# Altium PCB PCB3.PcbDoc
Units mil, origin at the board's own origin, x right, y up, seen from the top; angles counter-clockwise.
Board outline 6000 x 4000 mil, 2 copper layers (Top Layer, Bottom Layer); 15 components, 19 nets, 63 pads, 0 vias.
Unrouted connection lines stored in the file: 43.
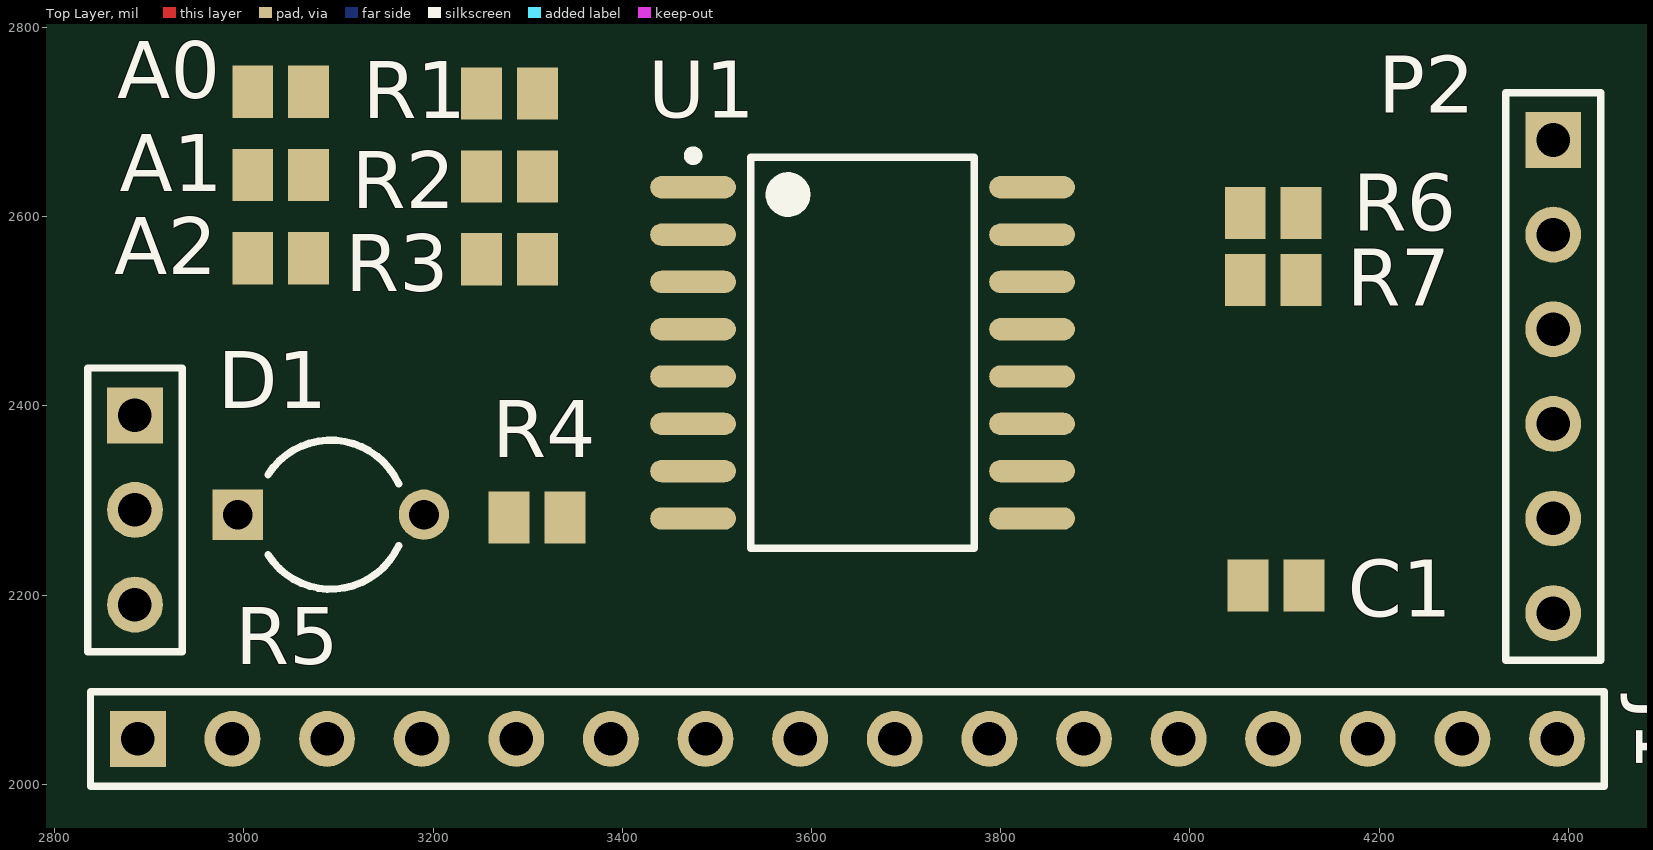
[diagram p0: Top Layer view]
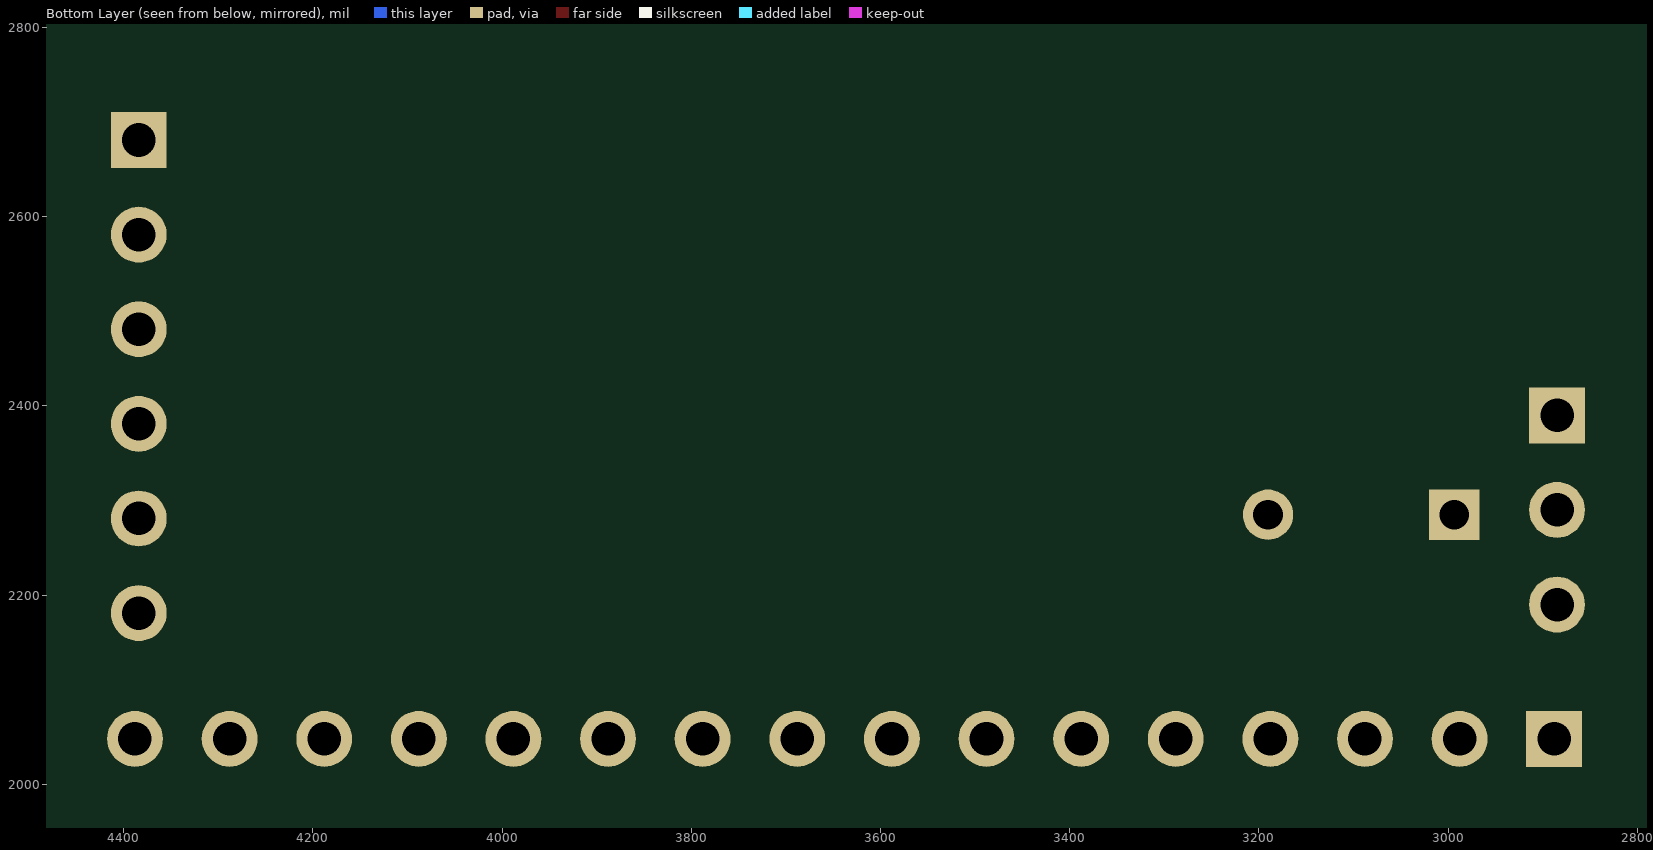
[diagram p1: Bottom Layer view, seen from below]

## Layer stack, top to bottom
Top Layer: signal copper 1.4
Dielectric: dielectric 12.6, FR-4, Dk 4.8
Bottom Layer: signal copper 1.4

## Board outline
1000,1000 7000,1000 7000,5000 1000,5000

## Design rules (kind name [scope] priority, off if disabled: settings)
Clearance [All] p1: gap=10
PolygonConnect [All] p1: connectstyle=Relief reliefconductorwidth=10 reliefentries=4 polygonreliefangle="90 Angle" airgapwidth=10
RoutingVias [All] p1: holewidth=28 width=50 viastyle="Through Hole" minholewidth=28 minwidth=50 maxholewidth=28 maxwidth=50
SilkscreenOverComponentPads [All] p1: minsilkscreentomaskgap=10
SolderMaskExpansion [All] p1: expansion=4
Width [All] p1: maxlimit=10 minlimit=10 preferedwidth=10
27 further rules are at their usual default settings.

## Components (designator, comment, footprint, x,y, rotation, side; value= is the part's Value field where it differs from the comment)
A0 "Res2" C0805 3039,2732 r0 top
A1 "Res2" C0805 3039,2644 r0 top
A2 "Res2" C0805 3039,2556 r0 top
C1 "Cap Semi" C0805 4091,2210 r180 top
D1 "LED0" CAPR5-4X5 3092,2285 r0 top
J1 "LCD1602" HDR1X16 2888,2048 r0 top
P2 "Header 6" HDR1X6 4384,2681 r270 top
R1 "Res2" C0805 3281,2730 r0 top
R2 "Res2" C0805 3281,2642.5 r0 top
R3 "Res2" C0805 3281,2555 r0 top
R4 "Res2" C0805 3310,2282 r0 top
R5 "RPot" HDR1X3 2885,2390 r270 top
R6 "Res2" C0805 4088,2604 r0 top
R7 "Res2" C0805 4088,2533 r0 top
U1 "PCF8574" PCF8574 3654,2456 r0 top

## Footprints (in the part's own frame and the unit in brackets; to place one, negate y for a bottom-side part, rotate by r counter-clockwise, add the part's x,y. Pads: shape width x height; smd on the part's side, far side on the other; paste and mask are expansions set on the pad)
C0805 [mm] "Chip Capacitor, Body 2.0x1.3mm, IPC High Density"
  rect 1.1x1.4 smd: 1(-0.75,0) 2(0.75,0)
  body extent -1.1,-0.72 1.1,0.72, height 1.4
CAPR5-4X5 [mm] "Capacitor; 2 Leads"
  rect 1.35x1.35 hole 0.8: 1(-2.5,0)
  round 1.35 hole 0.8: 2(2.5,0)
  silkscreen extent -1.69,-2 1.82,2
HDR1X3 [mm] "Connector; Header; 3 Position"
  rect 1.5x1.5 hole 0.9: 1(0,0)
  round 1.5 hole 0.9: 2(2.54,0) 3(5.08,0)
  silkscreen extent -1.27,-1.27 6.35,1.27
HDR1X6 [mm] "Connector; Header; 6 Position"
  rect 1.5x1.5 hole 0.9: 1(0,0)
  round 1.5 hole 0.9: 2(2.54,0) 3(5.08,0) 4(7.62,0) 5(10.16,0) 6(12.7,0)
  silkscreen extent -1.27,-1.27 13.97,1.27
HDR1X16 [mm] "Connector; Header; 16 Position"
  rect 1.5x1.5 hole 0.9: 1(0,0)
  round 1.5 hole 0.9: 2(2.54,0) 3(5.08,0) 4(7.62,0) 5(10.16,0) 6(12.7,0) 7(15.24,0) 8(17.78,0) 9(20.32,0) 10(22.86,0) 11(25.4,0) 12(27.94,0) 13(30.48,0) 14(33.02,0) 15(35.56,0) 16(38.1,0)
  silkscreen extent -1.27,-1.27 39.37,1.27
PCF8574 [mm] "SOIC, 16-Leads, Body 10.5x7.6mm (max), Pitch 1.27mm, IPC Medium Density"
  oval 2.3x0.6 smd: 1(-4.55,4.445) 2(-4.55,3.175) 3(-4.55,1.905) 4(-4.55,0.635) 5(-4.55,-0.635) 6(-4.55,-1.905) 7(-4.55,-3.175) 8(-4.55,-4.445) 9(4.55,-4.445) 10(4.55,-3.175) 11(4.55,-1.905) 12(4.55,-0.635) 13(4.55,0.635) 14(4.55,1.905) 15(4.55,3.175) 16(4.55,4.445)
  silkscreen extent -4.67,-5.25 3,5.42, body extent -3.8,-5.25 3.8,5.25, height 2.65

## Part data
A0 A1 A2 R1 R2 R3 R4 R6 R7: "Resistor"
C1: "Capacitor (Semiconductor SIM Model)"
D1: "Typical INFRARED GaAs LED"
J1: library part Component_2
P2: "Header, 6-Pin"
R5: "Potentiometer"
U1: library part Component_1

## Nets (pads, with @x,y where several pads share a name; then routed paths per layer and width w, separated by ;. In a path a pad name is that pad's centre, name@x,y a point inside that pad or via, vN(x,y) a via of type N, cw(c..) or ccw(c..) an arc to the next point about the centre after c; other vN are vias at no path point)
A0: A0.2 R1.2 U1.1
A1: A1.2 R2.2 U1.2
A2: A2.2 R3.2 U1.3
CS: J1.6 P2.6
DB0: J1.7 U1.4
DB1: J1.8 U1.5
DB2: J1.9 U1.6
DB3: J1.10 U1.7
DB4: J1.11 U1.9
DB5: J1.12 U1.10
DB6: J1.13 U1.11
DB7: J1.14 U1.12
GND: A0.1 A1.1 A2.1 C1.1 J1.1 J1.5 J1.16 P2.1 R4.1 R5.1 U1.8
NetD1_2: D1.2 R4.2
RS: J1.4 P2.5
SCL: P2.4 R7.1 U1.14
SDA: P2.3 R6.1 U1.15
VCC: C1.2 D1.1 J1.2 J1.15 P2.2 R1.1 R2.1 R3.1 R5.2 R6.2 R7.2 U1.16
VO: J1.3 R5.3
pads on no net: U1.13